# EAGLE board tiny-bridge (EAGLE 5.10)

Size 62.55 x 38.1 mm. Coordinates in mm from the lower left corner, seen from the top.
Outline: 0,0 62.55,0 62.55,38.1 0,38.1 0,0
Copper layers (1*16): Top 0.035mm / dielectric 1.5mm / Bottom 0.035mm
Design rules "SparkFun-HP1007-600x600dpi": minimum track width 10mil, minimum drill 20mil, track to track 12mil, track to pad 12mil, pad to pad 12mil, via to via 12mil, smd to smd 12mil, copper to edge 12mil, drill to drill 12mil, minimum pad ring 12mil, minimum via ring 10mil, stop-mask expansion 4mil, vias tented up to drill 25mil, thermal gap 10mil

## Footprints (pad centres in the part's own frame; a part is rotated, then mirrored left to right if it is on the bottom)
3,0-PAD = drill 3 pad 5.842 round: B3,0 0,0
XH-1X2-LONG-LOCK = drill 1.016 pad 1.88 long: 1 -1.397,0; 2 1.397,0
1X02 = drill 1.016 long: 1 -1.27,0; 2 1.27,0
CHIPLED_0805 = smd 1.2 x 1.2: A 0,-1.05; C 0,1.05
AXIAL-0.3 = drill 0.9 pad 1.88 round: P$1 -3.81,0; P$2 3.81,0
0805 = smd 0.8 x 1.2: 1 -0.9,0; 2 0.9,0
TO92-EBC = drill 0.813 long: B 0,-1.27; C 2.54,-1.27; E -2.54,-1.27

## Placement (x,y rotation side)
H3  MOUNT-PAD-ROUND3.0  [3,0-PAD]  59.05,29.84 0 top
JP1  MOTOR  [XH-1X2-LONG-LOCK]  24.45,32.7 0 top
JP3  POWER  [XH-1X2-LONG-LOCK]  59.69,8.26 270 top
JP4  PWM  [1X02]  28.57,5.71 0 top
LED1  RED  [CHIPLED_0805]  55.88,9.84 0 top
R1  0.2R  [AXIAL-0.3]  54.61,17.78 270 top
R2  1.8k  [AXIAL-0.3]  7.11,13.59 270 top
R3  220  [AXIAL-0.3]  32.26,16.89 142.8 top
R4  500  [0805]  54.67,3.87 270 top
R5  1.8k  [AXIAL-0.3]  48.51,12.45 90 top
R11  220  [AXIAL-0.3]  21.59,16.32 224.5 top
T1  8050  [TO92-EBC]  14.1,23.88 90 top
T2  8550  [TO92-EBC]  21.59,25.27 90 top
T3  9013  [TO92-EBC]  13.34,17.14 270 top
T4  8050  [TO92-EBC]  39.75,24.13 90 top
T5  8550  [TO92-EBC]  29.34,25.27 90 top
T6  9013  [TO92-EBC]  45.09,16.51 270 top

## Library data of the parts
H3 = holes
JP1 JP3 LED1 R1-R5 R11 T1-T6 = digital-toy
JP4 = pinhead

## Nets
BEMF1: JP1.2 T4.C T5.C
BEMF2: JP1.1 T1.C T2.C
GND: H3.B3,0 JP3.1 LED1.C R1.P$2
I-POINT: R1.P$1 T1.E T4.E
N$1: LED1.A R4.1
N$2: R11.P$1 T5.B
N$5: T4.B T6.E
N$6: R3.P$2 T2.B
N$8: T1.B T3.E
N$9: R11.P$2 T3.C
N$10: JP4.2 R5.P$1
N$11: R5.P$2 T6.B
N$12: R3.P$1 T6.C
N$13: JP4.1 R2.P$2
N$14: R2.P$1 T3.B
VCC: JP3.2 R4.2 T2.E T5.E

## Tracks (layer width: path | path; a pad name or v marks a point on that pad's centre or on a via)
BEMF1  (2 unrouted)
BEMF2  (2 unrouted)
GND  (3 unrouted)
I-POINT  (2 unrouted)
N$1  (1 unrouted)
N$2  (1 unrouted)
N$5  (1 unrouted)
N$6  (1 unrouted)
N$8  (1 unrouted)
N$9  (1 unrouted)
N$10  (1 unrouted)
N$11  (1 unrouted)
N$12  (1 unrouted)
N$13  (1 unrouted)
N$14  (1 unrouted)
VCC  (3 unrouted)

## Text on the board
Top: tH-V0 | 5V
Bottom: Motor